# EAGLE board gem_cape (EAGLE 7.7.0)

Size 105 x 80 mm. Coordinates in mm from the lower left corner, seen from the top.
Outline: 0,7 0,22 18.5,22 18.5,42 0,42 0,73 7,73 7,80 98,80 98,73 105,73 105,7 98,7 98,0 7,0 7,7 0,7
Copper layers (1*16): Top 0.035mm / dielectric 1.5mm / Bottom 0.035mm
Design rules "default": minimum track width 10mil, minimum drill 24mil, track to track 8mil, track to pad 8mil, pad to pad 8mil, via to via 8mil, smd to smd 8mil, copper to edge 40mil, drill to drill 8mil, minimum pad ring 10mil, minimum via ring 8mil, stop-mask expansion 4mil, vias tented up to drill 0mil, thermal gap 10mil
Holes 3 mm at 95,70 95,10 10,10 10,70

## Footprints (pad centres in the part's own frame; a part is rotated, then mirrored left to right if it is on the bottom)
PAK100/2500-5-10 = drill 1 pad 1.422: 1 -5.08,-1.27; 2 -5.08,1.27; 3 -2.54,-1.27; 4 -2.54,1.27; 5 0,-1.27; 6 0,1.27; 7 2.54,-1.27; 8 2.54,1.27; 9 5.08,-1.27; 10 5.08,1.27
SAMTEC_TSW-123-05-G-D = drill 1.016 square: 1 -55.88,-2.54 | drill 1.016: 2 -55.88,0; 3 -53.34,-2.54; 4 -53.34,0; 5 -50.8,-2.54; 6 -50.8,0; 7 -48.26,-2.54; 8 -48.26,0; 9 -45.72,-2.54; 10 -45.72,0; 11 -43.18,-2.54; 12 -43.18,0; 13 -40.64,-2.54; 14 -40.64,0; 15 -38.1,-2.54; 16 -38.1,0; 17 -35.56,-2.54; 18 -35.56,0; 19 -33.02,-2.54; 20 -33.02,0; 21 -30.48,-2.54; 22 -30.48,0; 23 -27.94,-2.54; 24 -27.94,0; 25 -25.4,-2.54; 26 -25.4,0; 27 -22.86,-2.54; 28 -22.86,0; 29 -20.32,-2.54; 30 -20.32,0; 31 -17.78,-2.54; 32 -17.78,0; 33 -15.24,-2.54; 34 -15.24,0; 35 -12.7,-2.54; 36 -12.7,0; 37 -10.16,-2.54; 38 -10.16,0; 39 -7.62,-2.54; 40 -7.62,0; 41 -5.08,-2.54; 42 -5.08,0; 43 -2.54,-2.54; 44 -2.54,0; 45 0,-2.54; 46 0,0
R0805 = smd 1.3 x 1.5: 1 -0.95,0; 2 0.95,0
SOIC127P600X175-8N = smd 1.981 x 0.559: 1 -2.464,1.905; 2 -2.464,0.635; 3 -2.464,-0.635; 4 -2.464,-1.905; 5 2.464,-1.905; 6 2.464,-0.635; 7 2.464,0.635; 8 2.464,1.905

## Placement (x,y rotation side)
CTRL  2510-5  [PAK100/2500-5-10]  85.5,71 0 top
DEC1  2510-5  [PAK100/2500-5-10]  41.5,71 0 top
FRAME1  FRAME-LETTER  [CREATIVE_COMMONS]  21,-8 0 top  (outside the outline)
P8  TSW-123-05-G-D  [SAMTEC_TSW-123-05-G-D]  74.5,11.5 180 bottom
P9  TSW-123-05-G-D  [SAMTEC_TSW-123-05-G-D]  74.5,60 180 bottom
R1  220  [R0805]  2,-12 0 top  (outside the outline)
R2  220  [R0805]  2,-18.5 0 top  (outside the outline)
R3  220  [R0805]  2,-25 0 top  (outside the outline)
R4  220  [R0805]  2,-31.5 0 top  (outside the outline)
R5  220  [R0805]  2,-38 0 top  (outside the outline)
R6  220  [R0805]  2,-44.5 0 top  (outside the outline)
R7  220  [R0805]  2,-51 0 top  (outside the outline)
R8  220  [R0805]  2,-57.5 0 top  (outside the outline)
RA  2510-5  [PAK100/2500-5-10]  19.5,71 0 top
U1  SN65HVD379  [SOIC127P600X175-8N]  27,45.5 0 top
U2  SN65HVD379  [SOIC127P600X175-8N]  47,45.5 0 top

## Library data of the parts
CTRL DEC1 RA = con-3m; OC_FARNELL: 1788669; OC_NEWARK: unknown
FRAME1 = SparkFun-Aesthetics
P8 P9 = SAMTEC-TSW-xxx-D_By_element14_Batch_1; MPN: TSW-123-05-G-D; OC_FARNELL: 2024660; OC_NEWARK: 12P2647; PACKAGE: Post header-46Pin; SUPPLIER: Samtec
R1-R8 = resistor
U1 U2 = Texas Instruments_By_element14_Batch_1; MPN: SN65HVD379; PACKAGE: SOIC-8; SUPPLIER: TI

## Nets
+3V3: CTRL.6 U1.1 U2.1
DEC-RX: P9.22 U2.3
DEC-RX+: DEC1.4 U2.5
DEC-RX-: DEC1.8 U2.6
DEC-TX: P9.21 U2.2
DEC-TX+: DEC1.2 U2.8
DEC-TX-: DEC1.6 U2.7
GND: CTRL.5 DEC1.10 RA.10 U1.4 U2.4
GUIDE-DEC+: P8.43 R3.2
GUIDE-DEC-: P8.46 R2.2
GUIDE-RA+: P8.44 R4.2
GUIDE-RA-: P8.45 R1.2
HBOX0: P8.10 R8.2
HBOX1: P8.9 R7.2
HBOX2: P8.8 R6.2
HBOX3: P8.7 R5.2
N$9: CTRL.1 R1.1
N$10: CTRL.2 R2.1
N$11: CTRL.3 R3.1
N$12: CTRL.4 R4.1
N$13: CTRL.7 R5.1
N$14: CTRL.8 R6.1
N$15: CTRL.9 R7.1
N$16: CTRL.10 R8.1
RA-RX: P9.26 U1.3
RA-RX+: RA.4 U1.5
RA-RX-: RA.8 U1.6
RA-TX: P9.24 U1.2
RA-TX+: RA.2 U1.8
RA-TX-: RA.6 U1.7

## Tracks (layer width: path | path; a pad name or v marks a point on that pad's centre or on a via)
+3V3  (2 unrouted)
DEC-RX  (1 unrouted)
DEC-RX+  (1 unrouted)
DEC-RX-  (1 unrouted)
DEC-TX  (1 unrouted)
DEC-TX+  (1 unrouted)
DEC-TX-  (1 unrouted)
GND  (4 unrouted)
GUIDE-DEC+  (1 unrouted)
GUIDE-DEC-  (1 unrouted)
GUIDE-RA+  (1 unrouted)
GUIDE-RA-  (1 unrouted)
HBOX0  (1 unrouted)
HBOX1  (1 unrouted)
HBOX2  (1 unrouted)
HBOX3  (1 unrouted)
N$9  (1 unrouted)
N$10  (1 unrouted)
N$11  (1 unrouted)
N$12  (1 unrouted)
N$13  (1 unrouted)
N$14  (1 unrouted)
N$15  (1 unrouted)
N$16  (1 unrouted)
RA-RX  (1 unrouted)
RA-RX+  (1 unrouted)
RA-RX-  (1 unrouted)
RA-TX  (1 unrouted)
RA-TX+  (1 unrouted)
RA-TX-  (1 unrouted)